# EAGLE board ECA0407_PCB_FET_Amplifier (EAGLE 9.6.2)
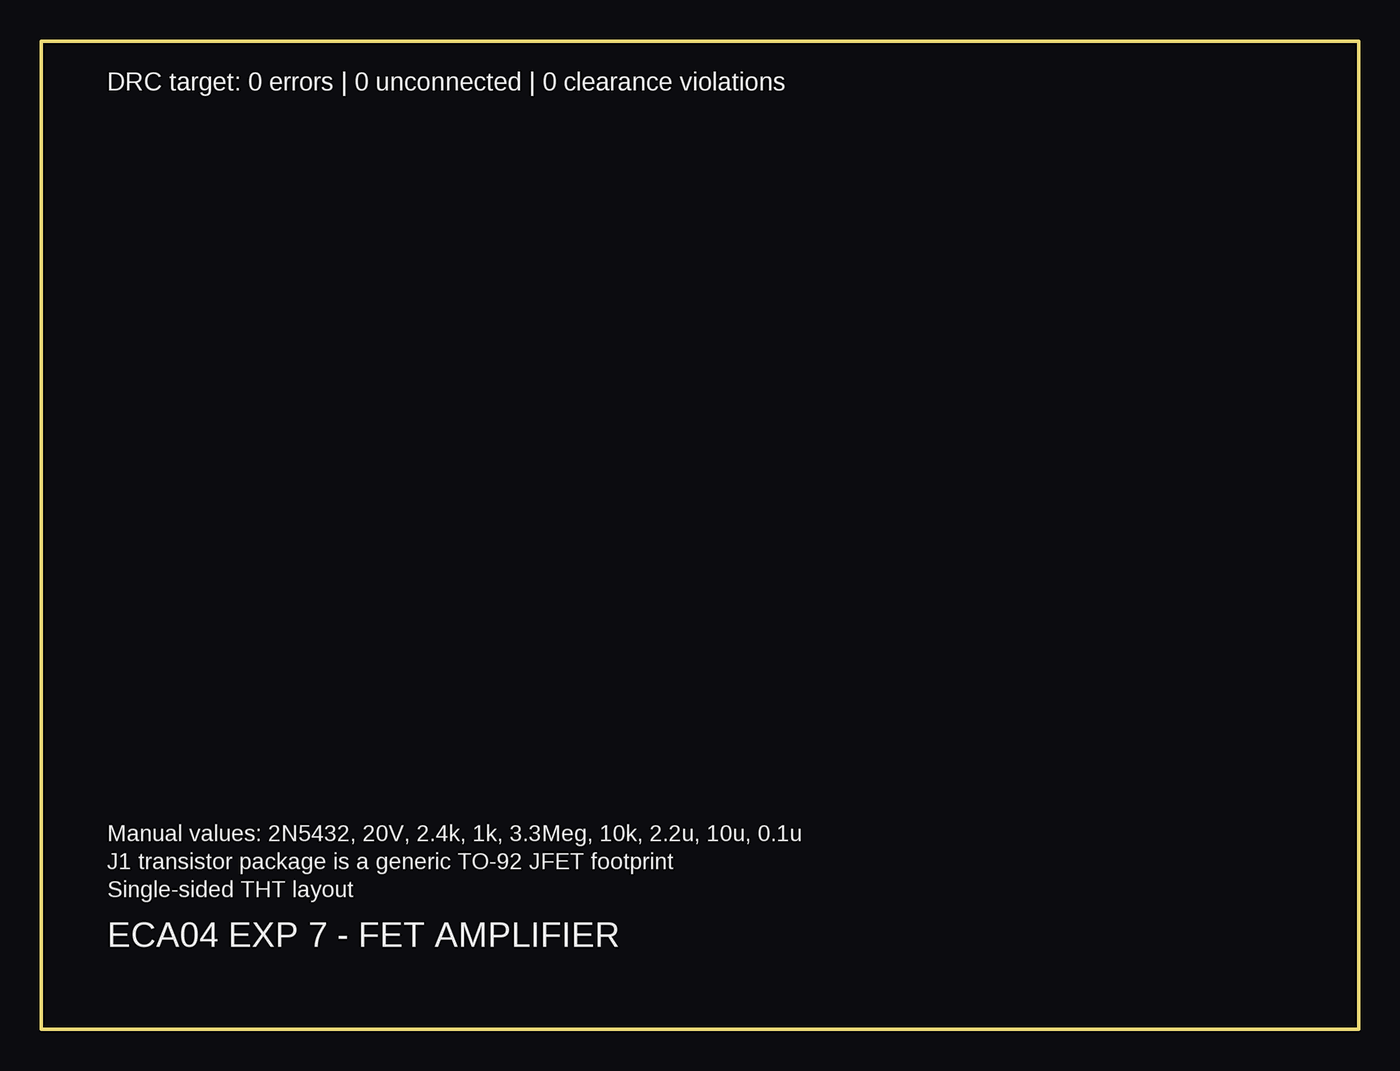
[diagram p0: board, top side]
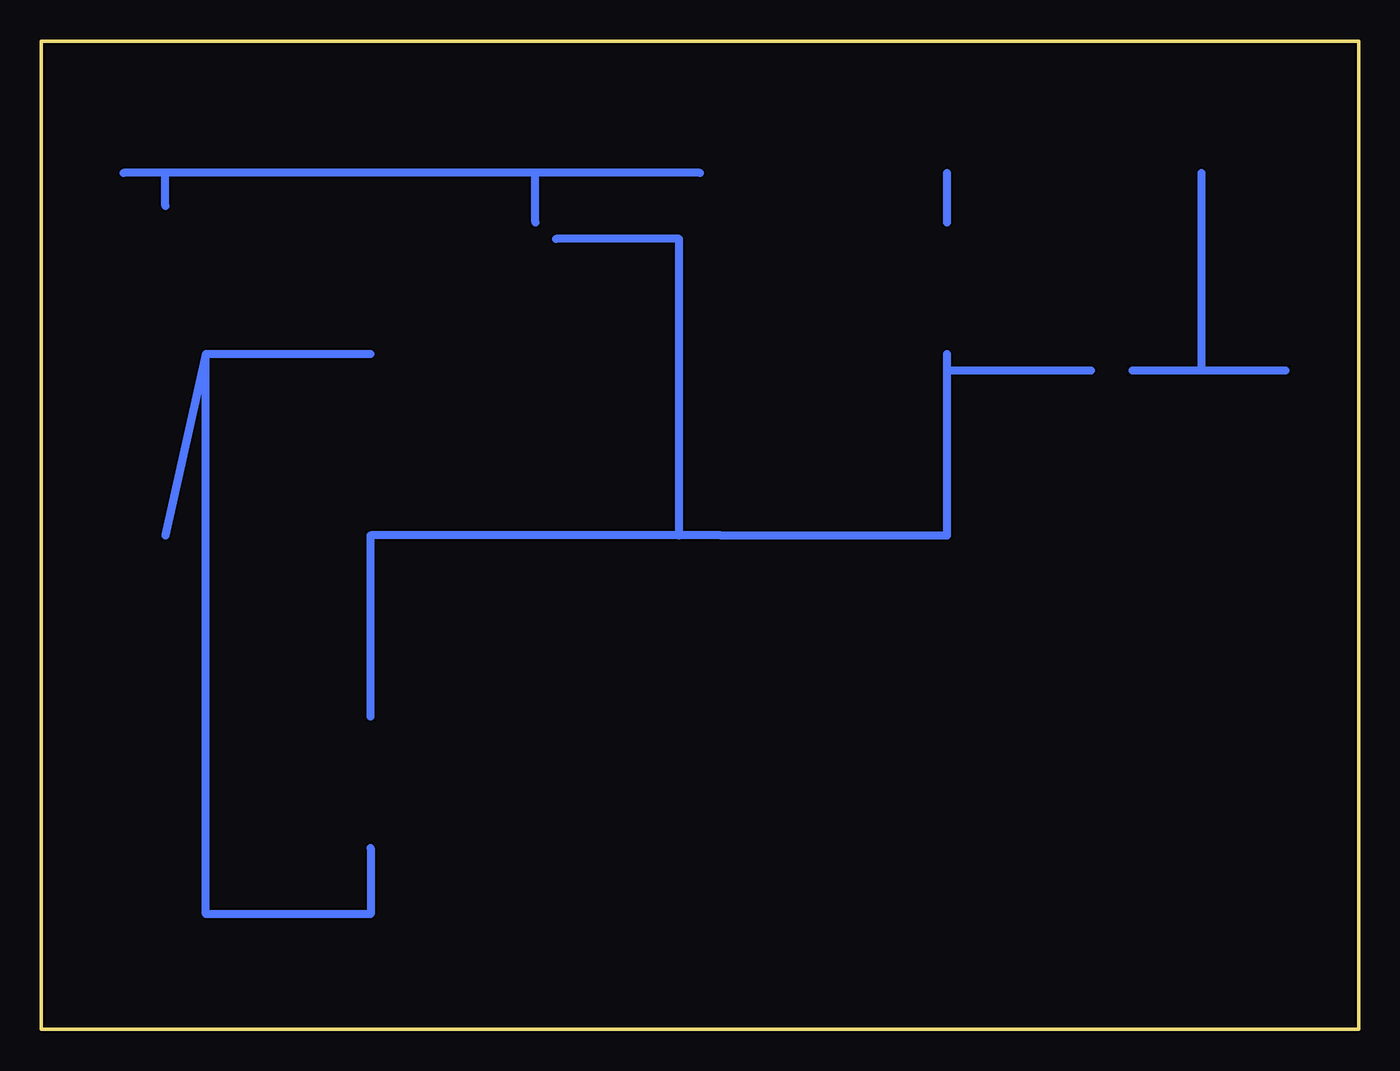
[diagram p1: board, bottom side, seen from below]

Size 80 x 60 mm. Coordinates in mm from the lower left corner, seen from the top.
Outline: 0,0 80,0 80,60 0,60 0,0
Copper layers (1*16): Top / Bottom
Design rules: minimum track width 20mil, minimum drill 36mil, track to track 6mil, track to pad 6mil, pad to pad 6mil, via to via 6mil

## Placement (x,y rotation side)
C1  2.2u  [C_THT]  15,40 0 top
C2  10u  [C_THT]  50,48 0 top
C3  0.1u  [C_THT]  60,30 90 top
J1  2N5432  [TO92_JFET]  40,30 0 top
J2  INPUT  [HDR2]  7,40 0 top
J3  OUTPUT  [HDR2]  75,30 0 top
J4  VCC/GND  [HDR2]  75,50 0 top
R1  3.3Meg  [R_THT]  25,45 90 top
R2  1k  [R_THT]  40,48 0 top
R3  2.4k  [R_THT]  60,15 90 top
R4  10k  [R_THT]  70,45 90 top

## Library data of the parts
C1-C3 J1-J4 R1-R4 = Custom

## Nets
DRAIN: C3.1 J1.1 R3.2
GATE: C1.2 J1.2 R1.1
GND: C2.2 J2.2 J3.2 J4.2 R1.2 R2.2
INPUT: C1.1 J2.1
OUTPUT: C3.2 J3.1 R4.2
SOURCE: C2.1 J1.3 R2.1
VCC: J4.1 R3.1 R4.1

## Tracks (layer width: path | path; a pad name or v marks a point on that pad's centre or on a via)
DRAIN
  Bottom 0.5: 38.73,30 60,30 60,19
GATE
  Bottom 0.5: 38.73,30 25,30 25,41 | 25,41 | 16.27,40 25,40
GND
  Bottom 0.5: 40,52 75,52 | 25,49 25,52 | 50,49 50,52 | 9.54,40 9.54,52 | 72.46,50 72.46,52
INPUT
  Bottom 0.5: 4.46,40 13.73,40
OUTPUT
  Bottom 0.5: 60,41 70,41 72.46,30
SOURCE
  Bottom 0.5: 41.27,30 41.27,48 48.73,48
VCC
  Bottom 0.5: 60,11 60,7 70,7 70,41

## Text on the board
tPlace: DRC target: 0 errors | 0 unconnected | 0 clearance violations | Manual values: 2N5432, 20V, 2.4k, 1k, 3.3Meg, 10k, 2.2u, 10u, 0.1u | J1 transistor package is a generic TO-92 JFET footprint | Single-sided THT layout | ECA04 EXP 7 - FET AMPLIFIER